# Altium PCB ADA.PcbDoc (part 3 of 3)
Units mm, origin at the board's own origin, x right, y up, seen from the top; angles counter-clockwise.
Board outline 200 x 100 mm, 2 copper layers (Top Layer, Bottom Layer); 139 components, 141 nets, 517 pads, 145 vias.
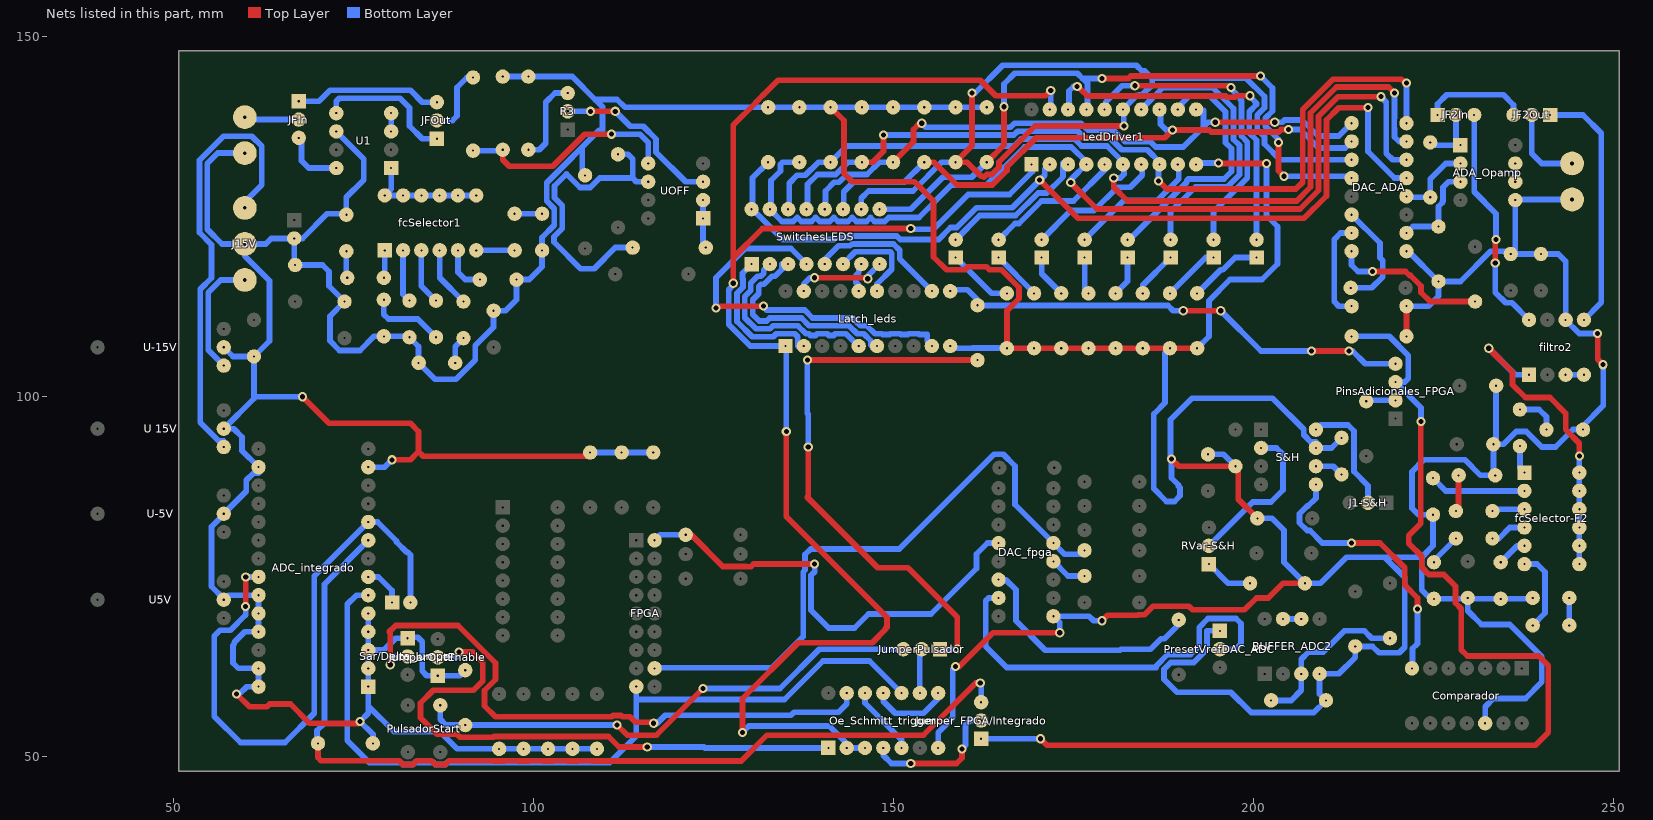
[diagram p2: the nets of this part, all layers, seen from the top]

## Via types
v1: diameter 1.27, hole 0.711, Top Layer to Bottom Layer, 145 vias

## Nets (pads, with @x,y where several pads share a name; then routed paths per layer and width w, separated by ;. In a path a pad name is that pad's centre, name@x,y a point inside that pad or via, vN(x,y) a via of type N, cw(c..) or ccw(c..) an arc to the next point about the centre after c; other vN are vias at no path point) (continued)
GND_ADC_net: "U 15V.2" ADA_Opamp.5 ADC_integrado.1 ADC_integrado.2 ADC_integrado.3 ADC_integrado.4 ADC_integrado.5 ADC_integrado.13 ADC_integrado.16 ADC_integrado.23 ADC_integrado.24 ADC_integrado.25 ADC_integrado.27 ADC_integrado.28 AlimentacionFPGA.2 BUFFER_ADC2.4 C1-F2.1 C1.1 C3-F2.1 C3.1 C4-F2.1 C4.1 C6-F2.1 C6.1 C8-F2.1 C8.1 C9.1 C10-F2.1 C_decouop_adc_chip.1 C_decoupComp.2 C_decoupDACBuffer.1 Ccoup1-Filter.1 Ccoup1-S&H.2 Ccoup2-Filter.1 Ccoup2-S&H.2 Ccoup-F2a.1 Ccoup-F2b.1 Ccoupvcc1.2 Ccoupvcc3.2 Ccoupvcc5.2 Ccoupvcc7.2 Ch-S&H.2 CLK_RES0.2 CLK_RES1.2 CLK_RES2.2 CLK_RES3.2 CLK_RES4.2 CLK_RES5.2 CLK_RES6.2 CLK_RES7.2 Comparador.12 D2OFF.1 DAC_ADA.1 DAC_ADA_R2.2 DAC_ADA_R4.1 DAC_fpga.1 Divisor10V_ADC_R2.1 Entrada.1 filtro2.6 J15V.2 JumperOutEnable.1 Latch_leds.10 LedDriver1.10 OE_PulldownADC_R1.1 OE_PulldownADC_R2.1 Oe_Schmitt_trigger.7 PresetVrefDAC_ADC.1 R1-S&H.1 R4.1 R6.1 R_de_JohnLednon1.2 R_de_JohnLednon2.2 R_de_JohnLednon3.2 R_de_JohnLednon4.2 R_de_JohnLednon5.2 R_de_JohnLednon6.2 R_de_JohnLednon7.2 R_de_JohnLednon8.2 R_de_TaxiDriver1.2 R_de_TaxiDriver2.2 R_de_TaxiDriver3.2 R_de_TaxiDriver4.2 R_de_TaxiDriver5.2 R_de_TaxiDriver6.2 R_de_TaxiDriver7.2 R_de_TaxiDriver8.2 R_PullDownPulsador.2 S&H.7 Salida.2 Sar/Delta_Jumper.1 U1.6 U5V.2 U-5V.2 U-15V.2 | length 1047.9
  Top Layer w0.8: v1(58.801,58.674) 60.585,56.89 63.009,56.89 63.396,57.277 66.283,57.277 68.944,54.616 71.264,54.616 71.313,54.567 75.649,54.567 v1(75.946,54.864) ; v1(67.945,99.949) 71.628,96.266 82.931,96.266 84.074,95.123 84.074,92.329 ; v1(80.391,91.186) 82.931,91.186 84.074,92.329 ; CLK_RES0.2@107.886,92.202 107.379,91.694 84.709,91.694 84.074,92.329 ; R_de_TaxiDriver3.2@141.278,140.132 143.129,138.281 143.129,130.937 144.272,129.794 152.908,129.794 155.575,127.127 155.575,119.355 157.351,117.578 159.931,117.578 160.336,117.983 162.916,117.983 163.32,117.578 164.997,117.578 167.453,115.122 167.453,113.596 165.753,111.896 R_de_JohnLednon8.2@165.753,106.68 R_de_JohnLednon7.2@169.527,106.68 R_de_JohnLednon6.2@173.301,106.68 R_de_JohnLednon5.2@177.074,106.68 R_de_JohnLednon4.2@180.848,106.68 R_de_JohnLednon3.2@184.622,106.68 R_de_JohnLednon2.2@188.395,106.68 R_de_JohnLednon1.2@192.169,106.68 ; v1(158.623,62.484) 159.131,62.484 163.83,67.183 v1(173.101,67.183) ; v1(178.943,68.834) 179.705,69.596 183.913,69.596 183.991,69.674 184.854,69.674 186.046,70.866 191.008,70.866 191.516,70.358 198.755,70.358 200.406,72.009 202.057,72.009 204.089,74.041 R1-S&H.1@207.137,74.041 ; v1(188.595,91.313) 189.611,90.297 Ccoup1-S&H.2@197.485,90.297 197.866,89.916 197.866,85.725 C_decoupComp.2@200.533,83.058 ; v1(195.123,132.385) 195.174,132.334 v1(201.803,132.334) ; OE_PulldownADC_R1.1@221.234,108.331 DAC_ADA_R2.2@221.234,112.522 ; v1(247.777,108.712) 247.777,105.156 v1(248.539,104.394)
  Bottom Layer w0.8: U-15V.2@57.023,106.807 58.293,105.537 Ccoupvcc5.2@61.214,105.537 ; v1(58.801,58.674) 59.182,58.674 60.198,59.69 ADC_integrado.28@61.849,59.69 ADC_integrado.27@61.849,62.23 59.055,62.23 58.293,62.992 58.293,65.422 58.485,65.614 58.485,65.851 59.944,67.31 ADC_integrado.25@61.849,67.31 ADC_integrado.24@61.849,69.85 ADC_integrado.23@61.849,72.39 57.658,72.39 U5V.2@57.023,71.755 57.023,71.891 55.323,73.591 55.323,81.906 57.023,83.606 U-5V.2@57.023,83.693 60.149,86.819 60.149,88.334 61.145,89.33 61.849,89.33 ADC_integrado.16@61.849,90.17 59.563,92.456 59.563,94.361 58.42,95.504 57.023,95.504 61.214,99.695 ; Entrada.1@59.944,133.771 56.174,133.771 54.737,132.334 54.737,123.19 56.769,121.158 J15V.2@59.944,121.158 ; v1(67.945,99.949) 61.468,99.949 61.214,99.695 ; U1.6@72.644,136.779 76.454,132.969 76.454,130.048 74.041,127.635 C1.1@74.041,125.222 73.914,125.349 71.374,125.349 67.945,121.92 AlimentacionFPGA.2@66.802,121.92 ; ADC_integrado.5@77.089,69.85 ADC_integrado.4@77.089,67.31 ADC_integrado.3@77.089,64.77 ; ADC_integrado.13@77.089,90.17 79.375,90.17 v1(80.391,91.186) ; OE_PulldownADC_R2.1@77.724,51.816 77.724,53.086 v1(75.946,54.864) 77.089,56.007 77.089,57.023 ; R_PullDownPulsador.2@90.551,61.976 89.789,61.214 JumperOutEnable.1@86.741,61.214 85.217,61.214 84.582,61.849 84.582,65.913 83.947,66.548 82.677,66.548 Sar/Delta_Jumper.1@82.55,66.421 80.899,66.421 79.248,64.77 ADC_integrado.3@77.089,64.77 ; R6.1@95.758,144.399 R4.1@99.314,144.399 105.41,144.399 108.648,141.16 ; 106.807,134.493 106.807,131.064 D2OFF.1@107.188,130.683 ; CLK_RES0.2@107.886,92.202 CLK_RES1.2@112.268,92.202 CLK_RES2.2@116.649,92.202 ; CLK_RES7.2@108.839,51.054 CLK_RES6.2@105.442,51.054 CLK_RES5.2@102.044,51.054 CLK_RES4.2@98.647,51.054 CLK_RES3.2@95.25,51.054 89.408,51.054 86.995,53.467 80.645,53.467 77.089,57.023 ; Oe_Schmitt_trigger.7@156.21,51.181 156.21,53.34 158.242,55.372 158.242,62.103 v1(158.623,62.484) ; Latch_leds.10@157.879,106.985 158.184,106.68 160.918,106.68 ; 160.967,106.729 165.753,106.729 R_de_JohnLednon8.2@165.753,106.68 ; R_de_TaxiDriver8.2@162.959,140.132 R_de_TaxiDriver7.2@158.623,140.132 R_de_TaxiDriver6.2@154.287,140.132 R_de_TaxiDriver5.2@149.951,140.132 R_de_TaxiDriver4.2@145.615,140.132 R_de_TaxiDriver3.2@141.278,140.132 R_de_TaxiDriver2.2@136.942,140.132 R_de_TaxiDriver1.2@132.606,140.132 112.725,140.132 111.633,141.224 108.712,141.224 108.648,141.16 ; v1(173.101,67.183) 173.101,68.58 DAC_fpga.1@172.212,69.469 177.165,69.469 177.8,68.834 v1@178.816,68.834 ; R_de_JohnLednon2.2@188.395,106.68 187.723,106.008 187.723,99.109 186.16,97.546 186.16,87.161 187.915,85.406 189.021,85.406 189.803,86.188 189.803,87.294 189.568,87.529 189.568,87.705 188.595,88.678 v1(188.595,91.313) 188.468,91.44 188.468,96.742 191.464,99.738 202.649,99.738 206.961,95.426 206.961,94.673 207.957,93.677 208.661,93.677 S&H.7@208.661,92.837 210.82,92.837 Ch-S&H.2@212.217,94.234 ; R_de_JohnLednon1.2@192.169,106.68 193.802,108.313 193.802,113.284 196.723,116.205 201.168,116.205 203.327,118.364 203.327,123.571 201.803,125.095 v1(201.803,132.334) ; LedDriver1.10@192.169,132.385 v1(195.123,132.385) ; Ccoup2-S&H.2@193.675,91.948 195.834,91.948 Ccoup1-S&H.2@197.485,90.297 ; PresetVrefDAC_ADC.1@195.326,67.437 193.548,67.437 193.548,64.897 191.692,63.041 188.517,63.041 187.579,62.103 187.579,60.706 189.357,58.928 196.85,58.928 199.693,56.085 208.358,56.085 Divisor10V_ADC_R2.1@210.058,57.785 209.169,58.674 BUFFER_ADC2.4@209.169,61.468 211.836,61.468 214.122,63.754 C_decoupDACBuffer.1@214.122,65.278 216.535,65.278 217.424,64.389 220.218,64.389 220.98,65.151 220.98,74.872 218.186,77.666 ; C_decoupComp.2@200.533,83.058 202.565,83.058 204.216,81.407 204.216,76.962 R1-S&H.1@207.137,74.041 209.296,74.041 212.921,77.666 218.186,77.666 ; DAC_ADA_R2.2@221.234,112.522 224.282,112.522 225.679,113.919 DAC_ADA_R4.1@225.679,115.951 ; DAC_ADA.1@221.234,120.142 221.488,120.142 DAC_ADA_R4.1@225.679,115.951 ; Ccoup-F2a.1@229.743,72.009 Ccoup-F2a.1@229.743,71.882 ; Comparador.12@232.156,54.61 232.156,56.896 233.299,58.039 237.744,58.039 240.03,60.325 240.03,63.881 235.585,68.326 231.648,68.326 229.743,70.231 Ccoup-F2a.1@229.743,71.882 ; Ccoupvcc7.2@233.68,101.346 233.68,93.726 Ccoup-F2b.1@233.299,93.345 ; C10-F2.1@238.76,72.009 238.633,71.882 C8-F2.1@234.315,71.882 Ccoup-F2a.1@229.743,71.882 ; Salida.2@244.221,127.334 236.427,127.334 ADA_Opamp.5@236.347,127.254 236.347,120.396 Ccoupvcc3.2@235.712,119.761 ; v1(247.777,108.712) 245.237,108.712 filtro2.6@243.332,110.617 243.332,118.745 242.316,119.761 C_decouop_adc_chip.1@239.903,119.761 Ccoupvcc3.2@235.712,119.761 ; v1(248.539,104.394) 248.539,98.679 245.745,95.885 C1-F2.1@245.745,95.377 244.348,95.377 241.935,92.964 240.03,92.964 237.871,95.123 236.474,95.123 234.696,93.345 Ccoup-F2b.1@233.299,93.345 ; J15V.2@59.944,121.158 62.865,121.158 63.627,121.92 AlimentacionFPGA.2@66.802,121.92 ; J15V.2@59.944,121.158 59.944,119.481 63.373,116.052 63.373,107.696 Ccoupvcc5.2@61.214,105.537 ; 61.214,99.695 Ccoupvcc5.2@61.214,105.537 ; AlimentacionFPGA.2@66.802,121.92 66.802,118.364 Ccoupvcc1.2@66.929,118.237 70.739,118.237 71.628,117.348 71.628,115.316 Ccoup2-Filter.1@73.787,113.157 71.755,111.125 71.755,107.705 73.083,106.377 75.929,106.377 77.883,108.331 C4.1@79.248,108.331 82.677,108.331 C3.1@82.804,108.204 84.074,106.934 C6.1@84.074,104.648 86.36,102.362 89.272,102.362 91.948,105.038 91.948,107.061 94.488,109.601 Ccoup1-Filter.1@94.488,111.887 96.139,111.887 97.663,113.411 C8.1@97.663,116.205 99.441,116.205 101.219,117.983 C9.1@101.219,120.269 101.219,122.047 102.919,123.747 102.919,126.053 101.854,127.118 101.854,129.667 109.138,136.951 109.536,136.951 109.601,137.016 109.601,140.208 108.648,141.16 ; 77.089,57.023 ADC_integrado.1@77.089,59.69 ADC_integrado.2@77.089,62.23 ADC_integrado.3@77.089,64.77 ; 218.186,77.666 223.344,77.666 ; 223.344,77.666 224.917,79.239 C3-F2.1@224.917,83.566 222.885,83.566 221.996,84.455 221.996,89.535 223.647,91.186 229.362,91.186 231.521,89.027 C4-F2.1@233.553,89.027 233.299,89.281 Ccoup-F2b.1@233.299,93.345 ; 223.344,77.666 223.344,73.103 224.565,71.882 C6-F2.1@225.044,71.882 Ccoup-F2a.1@229.743,71.882 ; DAC_ADA_R4.1@225.679,115.951 228.727,115.951 232.918,120.142 235.331,120.142 Ccoupvcc3.2@235.712,119.761
InvOpAmp: ADA_Opamp.2 DAC_ADA.4 DAC_ADA_R3.1 | length 11
  Bottom Layer w0.8: DAC_ADA.4@221.234,127.762 221.361,127.635 DAC_ADA_R3.1@224.536,127.635 224.536,130.175 226.695,132.334 ADA_Opamp.2@228.727,132.334
L1: DAC_ADA.5 LedDriver1.2 R_de_TaxiDriver1.1 SwitchesLEDS.16 | length 129.3
  Top Layer w0.8: v1(170.307,130.048) 175.641,124.714 207.01,124.714 210.12,127.824 210.12,138.365 211.836,140.081 v1(215.9,140.081)
  Bottom Layer w0.8: R_de_TaxiDriver1.1@132.606,132.512 130.447,130.353 130.447,126.129 SwitchesLEDS.16@130.302,125.984 130.438,125.984 134.629,121.793 141.7,121.793 141.911,122.004 143.531,122.004 143.791,122.264 150.468,122.264 150.939,121.793 156.288,121.793 157.937,123.442 158.786,123.442 161.538,126.195 166.508,126.195 171.009,130.696 171.009,131.545 LedDriver1.2@171.849,132.385 ; v1(215.9,140.081) 215.9,133.985 219.583,130.302 DAC_ADA.5@221.234,130.302
L2: DAC_ADA.6 LedDriver1.4 R_de_TaxiDriver2.1 SwitchesLEDS.15 | length 134
  Top Layer w0.8: v1(174.625,129.667) 178.265,126.027 206.45,126.027 209.02,128.597 209.02,138.899 211.726,141.605 v1(217.678,141.605)
  Bottom Layer w0.8: R_de_TaxiDriver2.1@136.942,132.512 134.635,132.512 134.306,132.183 134.306,131.294 132.987,129.975 132.987,126.129 SwitchesLEDS.15@132.842,125.984 134.542,124.284 136.086,124.284 136.643,124.841 136.661,124.841 137.218,124.284 138.626,124.284 139.183,124.841 139.201,124.841 139.758,124.284 141.166,124.284 141.723,124.841 141.741,124.841 142.298,124.284 143.706,124.284 144.263,124.841 144.281,124.841 144.838,124.284 146.246,124.284 146.803,124.841 146.821,124.841 147.378,124.284 148.786,124.284 149.343,124.841 153.543,124.841 158.031,129.329 162.889,129.329 168.18,134.62 174.694,134.62 176.929,132.385 174.625,130.081 v1(174.625,129.667) ; v1(217.678,141.605) 218.44,140.843 218.44,139.088 218.434,139.082 218.434,135.61 218.44,135.604 218.44,133.731 219.329,132.842 DAC_ADA.6@221.234,132.842
L3: DAC_ADA.7 LedDriver1.6 R_de_TaxiDriver3.1 SwitchesLEDS.14 | length 119.3
  Top Layer w0.8: v1(180.594,130.302) 180.594,129.032 182.499,127.127 205.994,127.127 207.92,129.053 207.92,139.355 211.505,142.94 218.756,142.94 v1(219.583,142.113)
  Bottom Layer w0.8: SwitchesLEDS.14@135.382,125.984 135.527,126.129 135.527,129.594 136.616,130.683 137.759,130.683 139.588,132.512 R_de_TaxiDriver3.1@141.278,132.512 143.514,134.747 166.751,134.747 167.724,135.72 175.15,135.72 176.123,134.747 179.647,134.747 182.009,132.385 182.009,130.828 181.483,130.302 v1(180.594,130.302) ; v1(219.583,142.113) 219.583,138.675 219.534,138.626 219.534,137.218 219.583,137.169 219.583,136.017 220.218,135.382 DAC_ADA.7@221.234,135.382
L4: DAC_ADA.8 LedDriver1.8 R_de_TaxiDriver4.1 SwitchesLEDS.13 | length 114.5
  Top Layer w0.8: R_de_TaxiDriver4.1@145.615,132.512 147.117,132.512 148.633,134.028 v1(148.633,136.271) ; v1(186.817,129.921) 187.96,128.778 205.867,128.778 206.82,129.731 206.82,139.81 211.05,144.04 220.535,144.04 221.234,143.341 v1(221.234,143.51)
  Bottom Layer w0.8: SwitchesLEDS.13@137.922,125.984 138.067,126.129 138.067,129.436 139.441,130.81 141.981,130.81 143.683,132.512 R_de_TaxiDriver4.1@145.615,132.512 ; v1(148.633,136.271) 166.719,136.271 167.268,136.82 175.605,136.82 176.578,135.847 180.103,135.847 181.711,134.239 185.235,134.239 187.089,132.385 186.817,132.113 v1(186.817,129.921) ; DAC_ADA.8@221.234,137.922 v1(221.234,143.51)
L5: DAC_ADA.9 LedDriver1.11 R_de_TaxiDriver5.1 SwitchesLEDS.12 | length 87.6
  Top Layer w0.8: R_de_TaxiDriver5.1@149.951,132.512 152.781,135.342 152.781,137.033 v1@153.67,137.922 ; v1(194.691,138.049) v1(202.946,138.049)
  Bottom Layer w0.8: SwitchesLEDS.12@140.462,125.984 140.553,126.075 140.553,128.524 141.739,129.71 142.436,129.71 143.538,130.812 146.319,130.812 148.019,132.512 R_de_TaxiDriver5.1@149.951,132.512 ; v1(153.924,137.922) 154.475,137.371 166.264,137.371 166.813,137.92 176.061,137.92 177.034,136.947 180.558,136.947 182.166,135.339 185.691,135.339 186.41,134.62 190.246,134.62 193.04,137.414 ; 193.04,139.7 193.04,137.414 ; v1(194.691,138.049) 193.675,138.049 193.04,137.414 ; v1(202.946,138.049) 203.979,138.049 204.298,138.368 206.723,138.368 208.947,136.144 211.836,136.144 DAC_ADA.9@213.614,137.922
L6: DAC_ADA.10 LedDriver1.13 R_de_TaxiDriver6.1 SwitchesLEDS.11 | length 85.3
  Top Layer w0.8: R_de_TaxiDriver6.1@154.287,132.512 155.651,132.512 158.834,129.329 163.736,129.329 165.759,131.352 165.759,131.825 169.824,135.89 187.665,135.89 v1(188.765,136.99) 193.862,136.99 194.138,136.714 203.499,136.714 203.818,137.033 v1(204.851,137.033)
  Bottom Layer w0.8: SwitchesLEDS.11@143.002,125.984 143.093,126.075 143.093,128.397 144.408,129.712 151.487,129.712 R_de_TaxiDriver6.1@154.287,132.512 ; LedDriver1.13@187.089,140.005 187.089,137.777 187.876,136.99 v1(188.765,136.99) ; v1(204.851,137.033) 206.502,137.033 209.042,134.493 212.725,134.493 DAC_ADA.10@213.614,135.382
L7: DAC_ADA.11 LedDriver1.15 R_de_TaxiDriver7.1 SwitchesLEDS.10 | length 127.9
  Top Layer w0.8: v1(160.909,142.113) 160.909,134.798 R_de_TaxiDriver7.1@158.623,132.512 160.223,132.512 162.179,130.556 162.433,130.556 162.56,130.429 162.943,130.812 163.663,130.812 164.659,131.808 164.659,132.528 169.672,137.541 v1(181.991,137.541)
  Bottom Layer w0.8: SwitchesLEDS.10@145.542,125.984 145.542,127.508 146.558,128.524 152.703,128.524 156.691,132.512 R_de_TaxiDriver7.1@158.623,132.512 ; v1(160.909,142.113) 161.313,142.113 165.166,145.966 183.703,145.966 184.497,145.172 184.901,145.172 185.928,144.145 ; v1(181.991,137.541) 181.991,139.987 182.009,140.005 183.798,141.794 184.068,141.794 184.133,141.859 184.531,141.859 185.928,143.256 185.928,144.145 ; DAC_ADA.11@213.614,132.842 203.708,132.842 201.524,135.026 201.524,136.027 200.511,137.04 200.511,139.058 201.524,140.071 201.524,141.613 198.927,144.21 185.993,144.21 185.928,144.145
L8: DAC_ADA.12 LedDriver1.17 R_de_TaxiDriver8.1 SwitchesLEDS.9 | length 96.1
  Top Layer w0.8: R_de_TaxiDriver8.1@162.959,132.512 165.354,134.907 v1(165.354,140.208) ; v1(178.943,144.145) 182.643,144.145 182.962,144.464 v1(200.976,144.464) ; v1(203.454,135.255) 203.454,131.318 v1(204.216,130.556)
  Bottom Layer w0.8: SwitchesLEDS.9@148.082,125.984 152.4,125.984 156.845,130.429 160.876,130.429 R_de_TaxiDriver8.1@162.959,132.512 ; v1(165.354,140.208) 165.354,143.383 166.837,144.866 175.538,144.866 176.259,144.145 ; LedDriver1.17@176.929,140.005 176.929,143.475 176.259,144.145 ; v1(178.943,144.145) 176.259,144.145 ; v1(200.976,144.464) 202.624,142.816 202.624,139.615 201.611,138.602 201.611,137.496 203.454,135.653 v1(203.454,135.255) ; v1(204.216,130.556) 213.36,130.556 DAC_ADA.12@213.614,130.302
LSB_ADC_OUT8: DAC_fpga.12 FPGA.2 R_ADC_D8.2 | length 64.3
  Top Layer w0.8: R_ADC_D8.2@121.158,80.772 121.92,80.772 126.316,76.376 129.482,76.376 129.531,76.327 130.175,76.327 130.556,76.708 v1(139.065,76.708)
  Bottom Layer w0.8: FPGA.2@116.84,80.01 117.602,80.772 R_ADC_D8.2@121.158,80.772 ; v1(139.065,76.708) 139.065,75.658 138.564,75.157 138.564,70.288 141.013,67.839 144.61,67.839 146.537,69.766 155.205,69.766 161.542,76.103 161.542,78.103 163.068,79.629 DAC_fpga.12@164.592,79.629
MSB_ADC_OUT1: DAC_fpga.5 FPGA.16 R_ADC_D1.2 | length 87.4
  Bottom Layer w0.8: FPGA.16@116.84,62.23 116.924,62.314 133.148,62.314 137.464,66.63 137.464,75.613 137.73,75.879 137.73,78.023 138.512,78.805 150.814,78.805 163.957,91.948 165.258,91.948 166.878,90.328 166.878,84.963 DAC_fpga.5@172.212,79.629 173.761,78.08 R_ADC_D1.2@176.53,78.08
Net+VrefDAC_ADC_R1_1: +VrefDAC_ADC_R1.1 DAC_fpga.14 | length 34
  Bottom Layer w0.8: DAC_fpga.14@164.592,74.549 165.608,74.549 167.005,73.152 167.005,68.834 171.091,64.748 181.461,64.748 181.589,64.876 185.685,64.876 187.15,66.341 187.626,66.341 +VrefDAC_ADC_R1.1@190.246,68.961
NetADA_Opamp_1: ADA_Opamp.1 DAC_ADA_R3.2 JF2In.2 | length 8.8
  Bottom Layer w0.8: DAC_ADA_R3.2@224.536,135.255 224.917,134.874 ADA_Opamp.1@228.727,134.874 228.092,135.509 JF2In.2@228.092,139.065
NetADA_Opamp_6: ADA_Opamp.6 ADA_Opamp.7 | length 2.5
  Bottom Layer w0.8: ADA_Opamp.6@236.347,129.794 ADA_Opamp.7@236.347,132.334
NetADC_integrado_7: ADC_integrado.7 Clock/EOC_Chip.1 | length 5.7
  Bottom Layer w0.8: ADC_integrado.7@77.089,74.93 78.486,74.93 80.391,73.025 Clock/EOC_Chip.1@80.391,71.374
NetADC_integrado_10: ADC_integrado.10 ADC_integrado.22 Clock/EOC_Chip.2 | length 85
  Top Layer w0.8: v1(60.058,70.795) 60.058,74.917 v1(60.071,74.93)
  Bottom Layer w0.8: v1(60.058,70.795) 60.058,69.632 57.941,67.515 56.483,67.515 55.688,66.72 55.688,55.564 59.331,51.921 65.51,51.921 69.596,56.007 69.596,75.057 ADC_integrado.10@77.089,82.55 78.359,82.55 81.004,79.905 81.004,79.763 82.43,78.337 82.572,78.337 82.931,77.978 Clock/EOC_Chip.2@82.931,71.374 ; v1(60.071,74.93) ADC_integrado.22@61.849,74.93
NetBUFFER_ADC2_3: BUFFER_ADC2.3 Divisor10V_ADC_R1.1 Divisor10V_ADC_R2.2 | length 23.5
  Bottom Layer w0.8: Divisor10V_ADC_R2.2@202.438,57.785 205.232,57.785 206.629,59.182 BUFFER_ADC2.3@206.629,61.468 206.629,63.5 207.645,64.516 209.677,64.516 212.598,67.437 215.392,67.437 216.408,66.421 Divisor10V_ADC_R1.1@218.948,66.421
NetBUFFER_ADC2_6: BUFFER_ADC2.6 BUFFER_ADC2.7 | length 2.5
  Bottom Layer w0.8: BUFFER_ADC2.7@204.089,69.088 BUFFER_ADC2.6@206.629,69.088
NetC1-F2_2: C1-F2.2 C2-F2.1 | length 5.9
  Bottom Layer w0.8: C2-F2.1@236.982,98.171 239.649,98.171 240.665,97.155 C1-F2.2@240.665,95.377
NetC1_2: C1.2 C2.1 | length 3.7
  Bottom Layer w0.8: C1.2@74.041,120.142 74.041,116.586 C2.1@74.168,116.459
NetC2-F2_2: C2-F2.2 fcSelector-F2.1 | length 3.9
  Bottom Layer w0.8: C2-F2.2@236.982,93.091 236.982,90.043 fcSelector-F2.1@237.617,89.408
NetC2_2: C2.2 fcSelector1.1 | length 3.9
  Bottom Layer w0.8: C2.2@79.248,116.459 79.375,116.586 fcSelector1.1@79.375,120.269
NetC3-F2_2: C3-F2.2 fcSelector-F2.2 | length 13.4
  Bottom Layer w0.8: C3-F2.2@224.917,88.646 226.695,86.868 fcSelector-F2.2@237.617,86.868
NetC3_2: C3.2 fcSelector1.2 | length 7.4
  Bottom Layer w0.8: fcSelector1.2@81.915,120.269 81.915,114.173 C3.2@82.804,113.284
NetC4-F2_2: C4-F2.2 C5-F2.1 | length 5.1
  Top Layer w0.8: C5-F2.1@228.092,84.074 228.473,84.455 C4-F2.2@228.473,89.027
NetC4_2: C4.2 C5.1 | length 10.6
  Bottom Layer w0.8: C4.2@79.248,113.411 79.248,111.379 79.883,110.744 83.947,110.744 C5.1@86.487,108.204
NetC5-F2_2: C5-F2.2 fcSelector-F2.3 | length 4.6
  Bottom Layer w0.8: C5-F2.2@233.172,84.074 233.426,84.328 fcSelector-F2.3@237.617,84.328
NetC5_2: C5.2 fcSelector1.3 | length 7.8
  Bottom Layer w0.8: fcSelector1.3@84.455,120.269 84.455,115.316 C5.2@86.487,113.284
NetC6-F2_2: C6-F2.2 C7-F2.1 | length 4.6
  Bottom Layer w0.8: C6-F2.2@225.044,76.962 225.044,77.216 C7-F2.1@228.092,80.264
NetC6_2: C6.2 C7.1 | length 3.9
  Bottom Layer w0.8: C6.2@89.154,104.648 89.154,106.934 C7.1@90.297,108.077
NetC7-F2_2: C7-F2.2 fcSelector-F2.4 | length 5.1
  Bottom Layer w0.8: C7-F2.2@233.172,80.264 234.061,80.264 235.585,81.788 fcSelector-F2.4@237.617,81.788
NetC7_2: C7.2 fcSelector1.4 | length 8.5
  Bottom Layer w0.8: fcSelector1.4@86.995,120.269 86.995,116.459 C7.2@90.297,113.157
NetC8-F2_2: C8-F2.2 fcSelector-F2.5 | length 4.2
  Bottom Layer w0.8: C8-F2.2@234.315,76.962 236.601,79.248 fcSelector-F2.5@237.617,79.248
NetC8_2: C8.2 fcSelector1.5 | length 6.5
  Bottom Layer w0.8: fcSelector1.5@89.535,120.269 89.535,117.221 90.551,116.205 C8.2@92.583,116.205
NetC9-F2_1: C9-F2.1 C10-F2.2 | length 3.8
  Bottom Layer w0.8: C9-F2.1@243.84,68.199 C10-F2.2@243.84,72.009
NetC9-F2_2: C9-F2.2 fcSelector-F2.6 | length 11.4
  Bottom Layer w0.8: fcSelector-F2.6@237.617,76.708 239.366,76.708 240.46,75.614 240.46,69.899 C9-F2.2@238.76,68.199
NetC9_2: C9.2 C10.1 | length 3.8
  Bottom Layer w0.8: C10.1@97.409,125.349 C9.2@101.219,125.349
NetC10_2: C10.2 fcSelector1.6 | length 5.3
  Bottom Layer w0.8: fcSelector1.6@92.075,120.269 C10.2@97.409,120.269
NetCh-S&H_1: Ch-S&H.1 S&H.6 | length 4
  Bottom Layer w0.8: S&H.6@208.661,90.297 211.074,90.297 Ch-S&H.1@212.217,89.154
NetComparador_7: Comparador.7 S&H.5 | length 38.5
  Top Layer w0.8: v1(213.614,79.629) 217.551,79.629 220.98,76.2 220.98,73.787 222.758,72.009 v1(222.758,70.485)
  Bottom Layer w0.8: S&H.5@208.661,87.757 208.661,85.852 207.567,84.758 207.449,84.758 206.375,83.684 206.375,82.432 207.449,81.358 207.821,81.358 209.55,79.629 v1(213.614,79.629) ; Comparador.7@221.996,62.23 222.08,62.314 222.08,64.981 222.758,65.659 v1(222.758,70.485)
NetDAC_ADA_14: DAC_ADA.14 DAC_ADA_R1.2 | length 15.5
  Bottom Layer w0.8: DAC_ADA_R1.2@213.487,115.062 216.408,115.062 217.932,116.586 217.932,118.872 217.551,119.253 217.551,121.285 DAC_ADA.14@213.614,125.222
NetDAC_ADA_15: DAC_ADA.15 DAC_ADA_R2.1 | length 14.1
  Bottom Layer w0.8: DAC_ADA_R2.1@213.614,112.522 211.836,112.522 211.201,113.157 211.201,121.793 212.09,122.682 DAC_ADA.15@213.614,122.682
NetDAC_ADA_16: DAC_ADA.16 DAC_ADA_cap.1 | length 21.7
  Top Layer w0.8: v1(216.535,117.348) 221.107,117.348 221.693,116.762 221.811,116.762 223.266,115.307 223.266,114.427 224.536,113.157 DAC_ADA_cap.1@230.759,113.157
  Bottom Layer w0.8: DAC_ADA.16@213.614,120.142 213.614,118.237 214.503,117.348 v1(216.535,117.348)
NetDAC_fpga_15: DAC_fpga.15 PresetVrefDAC_ADC.2 | length 55.7
  Bottom Layer w0.8: DAC_fpga.15@164.592,72.009 163.195,72.009 162.814,71.628 162.814,65.278 165.735,62.357 186.479,62.357 186.479,62.559 188.061,64.141 191.236,64.141 192.448,65.353 192.448,67.893 193.692,69.137 197.563,69.137 198.247,68.453 198.247,65.659 197.485,64.897 PresetVrefDAC_ADC.2@195.326,64.897
NetEntrada_2: Entrada.2 JFIn.2 | length 8.5
  Top Layer w0.6: Entrada.2@59.944,138.771 Entrada.2@60.285,138.43
  Bottom Layer w0.8: Entrada.2@59.944,138.771 60.285,138.43 JFIn.2@67.818,138.43
NetfcSelector1_7: fcSelector1.7 fcSelector1.8 fcSelector1.9 fcSelector1.10 fcSelector1.11 fcSelector1.12 U1.1 | length 16.9
  Bottom Layer w0.8: U1.1@80.264,131.699 80.264,128.778 fcSelector1.12@79.375,127.889 fcSelector1.11@81.915,127.889 fcSelector1.10@84.455,127.889 fcSelector1.9@86.995,127.889 fcSelector1.8@89.535,127.889 fcSelector1.7@92.075,127.889
NetfcSelector-F2_7: fcSelector-F2.7 fcSelector-F2.8 fcSelector-F2.9 fcSelector-F2.10 fcSelector-F2.11 fcSelector-F2.12 filtro2.1 | length 44.3
  Top Layer w0.8: v1(232.664,106.68) 235.966,103.378 235.966,101.6 237.744,99.822 241.173,99.822 243.332,97.663 243.332,95.377 245.237,93.472 v1(245.237,91.694)
  Bottom Layer w0.8: v1(232.664,106.68) 236.347,102.997 filtro2.1@238.252,102.997 ; fcSelector-F2.7@245.237,76.708 fcSelector-F2.8@245.237,79.248 fcSelector-F2.9@245.237,81.788 fcSelector-F2.10@245.237,84.328 fcSelector-F2.11@245.237,86.868 fcSelector-F2.12@245.237,89.408 v1(245.237,91.694)
Netfiltro2_3: filtro2.3 filtro2.4 | length 2.5
  Bottom Layer w0.8: filtro2.3@243.332,102.997 filtro2.4@245.872,102.997
Netfiltro2_5: filtro2.5 JF2Out.1 | length 35.1
  Bottom Layer w0.8: JF2Out.1@241.173,139.065 245.745,139.065 248.285,136.525 248.285,113.03 filtro2.5@245.872,110.617
Netfiltro2_8: filtro2.8 JF2In.3 | length 32
  Top Layer w0.8: v1(233.553,118.491) 233.553,121.666 v1(233.68,121.793)
  Bottom Layer w0.8: JF2In.3@230.632,139.065 230.632,128.397 233.68,125.349 v1(233.68,121.793) ; v1@233.553,118.237 233.553,114.436 235.008,112.981 235.888,112.981 filtro2.8@238.252,110.617
NetJ1-S&H_2: J1-S&H.2 S&H.8 | length 16.7
  Bottom Layer w0.8: S&H.8@208.661,95.377 209.296,96.012 213.106,96.012 213.946,95.172 213.946,89.552 215.9,87.598 J1-S&H.2@215.9,85.217
NetJ15V_1: J15V.1 U-15V.1 | length 16.9
  Bottom Layer w0.8: U-15V.1@57.023,104.267 54.864,106.426 54.864,114.427 56.595,116.158 J15V.1@59.944,116.158
NetJ15V_3: "U 15V.1" J15V.3 | length 63.1
  Bottom Layer w0.8: 57.023,92.964 57.023,93.804 56.319,93.804 53.764,96.359 53.764,114.883 55.323,116.442 55.323,121.048 53.637,122.734 53.637,132.79 56.968,136.121 60.917,136.121 62.294,134.744 62.294,129.349 59.944,126.999 J15V.3@59.944,126.158
NetJF2In_1: JF2In.1 JF2Out.3 | length 14.6
  Bottom Layer w0.8: JF2In.1@225.552,139.065 225.552,140.589 226.822,141.859 234.696,141.859 236.093,140.462 JF2Out.3@236.093,139.065
NetJF2Out_2: JF2Out.2 Salida.1 | length 11.5
  Bottom Layer w0.8: JF2Out.2@238.633,139.065 238.633,133.731 240.03,132.334 Salida.1@244.221,132.334
NetJFIn_1: JFIn.1 JFOut.3 | length 20.1
  Bottom Layer w0.8: JFIn.1@67.818,140.97 70.231,140.97 71.755,142.494 82.931,142.494 84.582,140.843 JFOut.3@86.614,140.843
NetJFIn_3: JFIn.3 U1.8 | length 8.4
  Bottom Layer w0.8: JFIn.3@67.818,135.89 67.818,132.715 68.834,131.699 U1.8@72.644,131.699
NetJFOut_1: JFOut.1 U1.5 | length 19.6
  Bottom Layer w0.8: U1.5@72.644,139.319 72.644,140.97 73.068,141.394 81.491,141.394 82.804,140.081 82.804,137.541 84.582,135.763 JFOut.1@86.614,135.763
NetJFOut_2: JFOut.2 R5.2 | length 9.8
  Bottom Layer w0.8: JFOut.2@86.614,138.303 88.773,138.303 89.408,138.938 89.408,142.875 90.805,144.272 R5.2@91.63,144.272
NetJOHN_LEDNON1_1: JOHN_LEDNON1.1 LedDriver1.18 | length 48.7
  Top Layer w0.8: 176.022,142.621 176.938,141.705 196.132,141.705 196.297,141.54 197.403,141.54 197.595,141.732 v1(199.517,141.732)
  Bottom Layer w0.8: LedDriver1.18@174.389,140.005 174.389,142.385 175.006,143.002 v1(175.514,143.002) ; v1@199.644,141.478 200.424,140.698 200.424,140.526 199.411,139.513 199.411,136.585 200.424,135.572 JOHN_LEDNON1.1@200.424,121.742
NetJOHN_LEDNON1_2: JOHN_LEDNON1.2 R_de_JohnLednon1.1 | length 10.3
  Bottom Layer w0.8: R_de_JohnLednon1.1@192.169,114.3 195.448,117.578 195.745,117.578 197.445,119.278 JOHN_LEDNON1.2@200.424,119.278
NetJOHN_LEDNON2_1: JOHN_LEDNON2.1 LedDriver1.16 | length 43
  Top Layer w0.8: v1(183.515,143.129) 196.596,143.129 v1(196.85,142.875)
  Bottom Layer w0.8: LedDriver1.16@179.469,140.005 179.469,140.861 181.737,143.129 v1(183.515,143.129) ; JOHN_LEDNON2.1@194.455,121.742 194.455,125.621 199.136,130.302 199.136,135.304 198.311,136.129 198.311,141.05 198.182,141.179 198.182,141.416 v1@196.977,142.621
NetJOHN_LEDNON2_2: JOHN_LEDNON2.2 R_de_JohnLednon2.1 | length 8.1
  Bottom Layer w0.8: R_de_JohnLednon2.1@188.395,114.3 193.374,119.278 JOHN_LEDNON2.2@194.455,119.278
NetJOHN_LEDNON3_1: JOHN_LEDNON3.1 LedDriver1.14 | length 40.2
  Bottom Layer w0.8: LedDriver1.14@184.549,140.005 187.419,142.875 194.31,142.875 197.211,139.974 197.211,135.673 198.036,134.848 198.036,130.758 196.353,129.075 191.94,129.075 188.486,125.621 JOHN_LEDNON3.1@188.486,121.742
NetJOHN_LEDNON3_2: JOHN_LEDNON3.2 R_de_JohnLednon3.1 | length 6.6
  Bottom Layer w0.8: R_de_JohnLednon3.1@184.622,114.3 184.622,115.414 JOHN_LEDNON3.2@188.486,119.278
NetJOHN_LEDNON4_1: JOHN_LEDNON4.1 LedDriver1.12 | length 35.2
  Bottom Layer w0.8: JOHN_LEDNON4.1@182.517,121.742 182.734,121.742 190.729,129.738 190.729,129.954 190.95,130.175 195.898,130.175 196.936,131.213 196.936,134.393 196.111,135.218 196.111,139.518 193.925,141.705 191.108,141.705 190.043,140.64 LedDriver1.12@190.043,140.005
NetJOHN_LEDNON4_2: JOHN_LEDNON4.2 R_de_JohnLednon4.1 | length 5.7
  Bottom Layer w0.8: R_de_JohnLednon4.1@180.848,114.3 182.517,115.969 JOHN_LEDNON4.2@182.517,119.278
NetJOHN_LEDNON5_1: JOHN_LEDNON5.1 LedDriver1.9 | length 18.8
  Bottom Layer w0.8: JOHN_LEDNON5.1@176.548,121.742 181.991,127.185 186.621,127.185 189.629,130.193 LedDriver1.9@189.629,132.385
NetJOHN_LEDNON5_2: JOHN_LEDNON5.2 R_de_JohnLednon5.1 | length 5.2
  Bottom Layer w0.8: JOHN_LEDNON5.2@176.548,119.278 176.548,114.826 R_de_JohnLednon5.1@177.074,114.3
NetJOHN_LEDNON6_1: JOHN_LEDNON6.1 LedDriver1.7 | length 19.4
  Bottom Layer w0.8: JOHN_LEDNON6.1@170.579,121.742 174.625,125.788 177.858,125.788 181.102,129.032 182.88,129.032 184.549,130.701 LedDriver1.7@184.549,132.385
NetJOHN_LEDNON6_2: JOHN_LEDNON6.2 R_de_JohnLednon6.1 | length 6.1
  Bottom Layer w0.8: JOHN_LEDNON6.2@170.579,119.278 170.579,117.021 R_de_JohnLednon6.1@173.301,114.3
NetJOHN_LEDNON7_1: JOHN_LEDNON7.1 LedDriver1.5 | length 19.7
  Bottom Layer w0.8: JOHN_LEDNON7.1@164.61,121.742 166.863,123.995 167.419,123.995 170.551,127.127 175.006,127.127 179.469,131.59 LedDriver1.5@179.469,132.385
NetJOHN_LEDNON7_2: JOHN_LEDNON7.2 R_de_JohnLednon7.1 | length 7
  Bottom Layer w0.8: JOHN_LEDNON7.2@164.61,119.278 169.527,114.362 R_de_JohnLednon7.1@169.527,114.3
NetJOHN_LEDNON8_1: JOHN_LEDNON8.1 LedDriver1.3 | length 21.3
  Bottom Layer w0.8: JOHN_LEDNON8.1@158.641,121.742 161.994,125.095 166.964,125.095 170.096,128.227 171.28,128.227 173.525,130.472 173.525,130.536 173.549,130.56 173.549,132.385 LedDriver1.3@174.389,132.385
NetJOHN_LEDNON8_2: JOHN_LEDNON8.2 R_de_JohnLednon8.1 | length 9.2
  Bottom Layer w0.8: JOHN_LEDNON8.2@158.641,119.278 163.62,114.3 R_de_JohnLednon8.1@165.753,114.3
NetJumper_FPGA/Integrado_2: Jumper_FPGA/Integrado.2 Oe_Schmitt_trigger.4 | length 19.9
  Top Layer w0.8: v1(152.4,49.022) 158.75,49.022 159.512,49.784 v1(159.512,51.054)
  Bottom Layer w0.8: Oe_Schmitt_trigger.4@148.59,51.181 148.59,50.165 149.733,49.022 v1(152.4,49.022) ; v1(159.512,51.054) 160.02,51.562 160.02,54.356 160.655,54.991 Jumper_FPGA/Integrado.2@162.179,54.991
NetJumperOutEnable_2: JumperOutEnable.2 Oe_Schmitt_trigger.1 | length 80
  Top Layer w0.8: v1(89.662,64.516) 91.567,64.516 92.964,63.119 92.964,60.452 91.694,59.182 86.106,59.182 84.328,57.404 84.328,55.372 86.614,53.086 89.417,53.086 89.847,52.656 94.448,52.656 94.546,52.754 110.441,52.754 111.887,51.308 v1(115.824,51.308)
  Bottom Layer w0.8: JumperOutEnable.2@86.741,63.754 89.281,63.754 v1@89.662,64.135 ; v1(115.824,51.308) 123.698,51.308 123.825,51.181 Oe_Schmitt_trigger.1@140.97,51.181
NetJumperPulsador_1: JumperPulsador.1 R_NewStart.2 | length 76.7
  Top Layer w0.8: v1(138.176,92.964) 138.176,86.106 138.049,85.979 147.828,76.2 152.019,76.2 158.877,69.342 v1(158.877,64.897) ; 138.684,105.029 R_NewStart.2@161.671,105.029
  Bottom Layer w0.8: v1(138.049,105.029) 138.049,97.663 138.176,97.536 v1(138.176,92.964) ; JumperPulsador.1@156.464,64.897 v1(158.877,64.897)
NetJumperPulsador_2: JumperPulsador.2 Oe_Schmitt_trigger.9 | length 6.2
  Bottom Layer w0.8: Oe_Schmitt_trigger.9@153.67,58.801 153.67,64.643 JumperPulsador.2@153.924,64.897
NetJumperPulsador_3: JumperPulsador.3 PulsadorStart.4 R_PullDownPulsador.1 | length 72.1
  Top Layer w0.8: v1(111.633,54.356) 113.03,52.959 117.094,52.959 v1(123.571,59.436)
  Bottom Layer w0.8: PulsadorStart.4@87.086,57.098 87.086,55.154 87.884,54.356 R_PullDownPulsador.1@90.551,54.356 v1(111.633,54.356) ; v1(123.571,59.436) 134.239,59.436 139.7,64.897 JumperPulsador.3@151.384,64.897
NetLatch_leds_2: Latch_leds.2 SwitchesLEDS.1 | length 20.7
  Bottom Layer w0.8: SwitchesLEDS.1@130.302,118.364 129.032,117.094 129.032,116.315 129.097,116.25 129.097,115.144 128.27,114.317 128.27,110.395 130.39,108.275 133.319,108.275 133.729,108.685 136.309,108.685 136.719,108.275 136.719,106.985 Latch_leds.2@137.559,106.985
NetLatch_leds_5: Latch_leds.5 SwitchesLEDS.2 | length 27.3
  Bottom Layer w0.8: SwitchesLEDS.2@132.842,118.364 132.002,117.524 132.002,117.074 131.592,116.664 131.142,116.664 130.197,115.719 130.197,114.688 129.37,113.861 129.37,110.914 130.909,109.375 132.864,109.375 133.274,109.785 136.765,109.785 137.865,108.685 138.263,108.685 138.49,108.458 139.168,108.458 139.395,108.685 140.803,108.685 141.03,108.458 141.708,108.458 141.935,108.685 143.408,108.685 145.108,106.985 Latch_leds.5@145.179,106.985
NetLatch_leds_6: Latch_leds.6 SwitchesLEDS.3 | length 29.8
  Bottom Layer w0.8: SwitchesLEDS.3@135.382,118.364 134.542,118.364 134.542,117.66 133.546,116.664 133.148,116.664 132.048,115.564 131.598,115.564 131.297,115.263 131.297,114.233 130.47,113.406 130.47,111.37 131.365,110.475 132.408,110.475 132.818,110.885 137.22,110.885 138.32,109.785 143.864,109.785 144.964,108.685 145.883,108.685 146.879,107.689 146.879,107.121 147.015,106.985 Latch_leds.6@147.719,106.985
NetLatch_leds_9: Latch_leds.9 SwitchesLEDS.4 | length 52.6
  Top Layer w0.8: v1(125.349,112.268) 125.603,112.522 v1(131.953,112.522)
  Bottom Layer w0.8: v1(125.349,112.268) 125.349,116.459 129.413,120.523 135.763,120.523 SwitchesLEDS.4@137.922,118.364 ; v1(131.953,112.522) 131.953,112.395 132.363,111.985 137.676,111.985 138.776,110.885 144.39,110.885 144.775,110.5 144.775,110.429 145.42,109.785 146.339,109.785 147.439,108.685 148.423,108.685 148.523,108.585 149.455,108.585 149.555,108.685 150.963,108.685 151.063,108.585 151.995,108.585 152.095,108.685 153.503,108.685 153.603,108.585 154.686,108.585 154.686,107.638 Latch_leds.9@155.339,106.985
NetLatch_leds_12: Latch_leds.12 SwitchesLEDS.5 | length 19.8
  Bottom Layer w0.8: SwitchesLEDS.5@140.462,118.364 140.462,118.999 142.367,120.904 143.986,120.904 144.246,121.164 150.013,121.164 150.882,120.295 150.882,119.062 Latch_leds.12@155.339,114.605
NetLatch_leds_15: Latch_leds.15 SwitchesLEDS.6 | length 13.7
  Bottom Layer w0.8: SwitchesLEDS.6@143.002,118.364 144.702,120.064 149.557,120.064 149.782,119.839 149.782,117.66 147.719,115.597 Latch_leds.15@147.719,114.605
NetLatch_leds_16: Latch_leds.16 SwitchesLEDS.7 | length 4.2
  Bottom Layer w0.8: Latch_leds.16@145.179,114.605 145.179,115.454 144.78,115.853 144.78,116.753 145.179,117.152 145.179,118.001 SwitchesLEDS.7@145.542,118.364
NetLatch_leds_19: Latch_leds.19 SwitchesLEDS.8 | length 13
  Top Layer w0.8: v1(139.065,116.459) 146.304,116.459 v1(146.431,116.332)
  Bottom Layer w0.8: Latch_leds.19@137.559,114.605 137.559,115.588 138.43,116.459 v1(139.065,116.459) ; v1(146.431,116.332) 146.431,116.713 SwitchesLEDS.8@148.082,118.364
NetOe_Schmitt_trigger_5: Oe_Schmitt_trigger.5 Oe_Schmitt_trigger.12 | length 9.7
  Bottom Layer w0.8: Oe_Schmitt_trigger.12@146.05,58.801 146.05,57.404 151.13,52.324 Oe_Schmitt_trigger.5@151.13,51.181
NetOe_Schmitt_trigger_8: Oe_Schmitt_trigger.8 Oe_Schmitt_trigger.11 | length 11.1
  Bottom Layer w0.8: Oe_Schmitt_trigger.11@148.59,58.801 148.59,57.658 150.241,56.007 154.178,56.007 156.21,58.039 Oe_Schmitt_trigger.8@156.21,58.801
NetOe_Schmitt_trigger_13: Oe_Schmitt_trigger.13 Sar/Delta_Jumper.2 | length 85.3
  Top Layer w0.8: v1(80.137,62.738) 80.137,67.183 80.01,67.31 80.899,68.199 89.535,68.199 94.742,62.992 94.742,60.674 93.218,59.15 93.218,57.023 94.742,55.499 110.888,55.499 111.08,55.691 112.186,55.691 112.378,55.499 113.411,55.499 114.173,54.737 116.586,54.737 v1(116.713,54.61)
  Bottom Layer w0.8: v1(80.137,62.738) 80.137,62.865 80.01,62.992 80.899,63.881 Sar/Delta_Jumper.2@82.55,63.881 ; v1@117.221,54.61 118.323,55.712 135.785,55.712 136.207,56.134 142.367,56.134 143.51,57.277 Oe_Schmitt_trigger.13@143.51,58.801
NetPinsAdicionales_FPGA_2: PinsAdicionales_FPGA.2 R_FPGA_S&H.2 | length 4.1
  Bottom Layer w0.8: R_FPGA_S&H.2@215.646,99.314 215.773,99.441 PinsAdicionales_FPGA.2@219.71,99.441
NetR1-S&H_2: R1-S&H.2 RVar-S&H.1 | length 6.8
  Bottom Layer w0.8: RVar-S&H.1@193.802,76.708 196.469,74.041 R1-S&H.2@199.517,74.041
NetR1_2: R1.2 R2.1 UOFF.6 | length 42.6
  Bottom Layer w0.8: R1.2@111.76,133.604 113.157,133.604 113.792,132.969 113.792,130.302 ; R2.1@113.792,120.65 111.379,120.65 108.458,117.729 106.553,117.729 102.87,121.412 102.87,122.142 104.019,123.291 104.019,126.509 102.954,127.574 102.954,129.211 104.605,130.862 106.484,128.983 107.892,128.983 109.211,130.302 113.792,130.302 ; UOFF.6@115.951,129.794 114.3,129.794 113.792,130.302
NetR2_2: R2.2 UOFF.1 UOFF.2 | length 6.8
  Bottom Layer w0.8: UOFF.2@123.571,127.254 UOFF.1@123.571,124.714 123.571,121.031 R2.2@123.952,120.65
NetR3_2: R3.2 UOFF.3 | length 23.9
  Top Layer w0.8: v1(107.95,139.573) v1(111.379,139.573)
  Bottom Layer w0.8: R3.2@104.775,139.573 v1(107.95,139.573) ; v1(111.379,139.573) 113.454,137.498 115.264,137.498 117.051,135.711 117.051,133.901 121.158,129.794 UOFF.3@123.571,129.794
NetR3_3: R3.3 R4.2 | length 12.1
  Bottom Layer w0.8: R4.2@99.314,134.239 100.838,134.239 101.727,135.128 101.727,140.843 102.997,142.113 R3.3@104.775,142.113
NetR5_1: R5.1 R6.2 UOFF.5 | length 30.5
  Top Layer w0.8: R6.2@95.758,134.239 95.758,132.842 96.647,131.953 102.685,131.953 107.13,136.398 v1(110.871,136.398)
  Bottom Layer w0.8: R5.1@92.456,134.112 95.631,134.112 R6.2@95.758,134.239 ; v1(110.871,136.398) 114.808,136.398 115.951,135.255 UOFF.5@115.951,132.334
NetRVar-S&H_2: RVar-S&H.2 S&H.2 | length 21.9
  Bottom Layer w0.8: RVar-S&H.2@193.802,79.248 199.898,85.344 202.438,85.344 204.089,86.995 204.089,91.948 203.2,92.837 S&H.2@201.041,92.837
NetU1_3: U1.3 U1.4 | length 2.5
  Bottom Layer w0.8: U1.3@80.264,136.779 U1.4@80.264,139.319
NewStartADA: Latch_leds.11 PinsAdicionales_FPGA.4 R_NewStart.1 | length 65.7
  Top Layer w0.8: v1(190.246,111.887) v1(195.453,111.887) ; v1(208.026,106.299) v1(213.233,106.299)
  Bottom Layer w0.8: Latch_leds.11@157.879,114.605 158.082,114.808 160.274,114.808 R_NewStart.1@161.544,113.538 ; R_NewStart.1@161.671,112.649 161.671,112.6 188.136,112.6 188.849,111.887 v1(190.246,111.887) ; v1(195.453,111.887) 201.041,106.299 v1(208.026,106.299) ; v1(213.233,106.299) 213.741,106.299 215.519,104.521 PinsAdicionales_FPGA.4@219.71,104.521
NoInvOpAmp: ADA_Opamp.3 DAC_ADA.2 DAC_ADA_R4.2 | length 13.3
  Bottom Layer w0.8: DAC_ADA.2@221.234,122.682 222.123,123.571 DAC_ADA_R4.2@225.679,123.571 225.679,126.374 226.236,126.931 226.236,127.049 226.314,127.127 226.314,129.032 227.076,129.794 ADA_Opamp.3@228.727,129.794
OE_chip_sel: ADC_integrado.9 Jumper_FPGA/Integrado.3 OE_PulldownADC_R2.2 | length 133.4
  Top Layer w0.8: OE_PulldownADC_R2.2@70.104,51.816 70.104,49.836 70.537,49.403 81.377,49.403 81.882,48.898 83.29,48.898 83.795,49.403 85.877,49.403 86.382,48.898 87.79,48.898 88.295,49.403 94.497,49.403 94.546,49.354 95.954,49.354 96.003,49.403 97.894,49.403 97.943,49.354 99.351,49.354 99.4,49.403 101.291,49.403 101.34,49.354 102.749,49.354 102.798,49.403 104.689,49.403 104.738,49.354 106.146,49.354 106.195,49.403 108.086,49.403 108.135,49.354 128.856,49.354 132.461,52.959 154.178,52.959 161.417,60.198 v1(162.052,60.198)
  Bottom Layer w0.8: OE_PulldownADC_R2.2@70.104,51.816 69.977,51.943 69.977,53.594 70.993,54.61 70.993,73.914 ADC_integrado.9@77.089,80.01 ; Jumper_FPGA/Integrado.3@162.179,57.531 v1@162.179,60.071
OE_fpga_sel: Jumper_FPGA/Integrado.1 OE_PulldownADC_R1.2 PinsAdicionales_FPGA.3 | length 159.9
  Top Layer w0.8: v1(170.434,52.451) 171.323,51.562 239.141,51.562 240.919,53.34 240.919,62.611 239.6,63.93 229.694,63.93 228.854,64.77 228.854,70.494 228.043,71.305 228.043,73.624 226.405,75.262 224.34,75.262 223.344,76.258 223.344,77.79 221.55,79.584 221.55,80.69 223.217,82.357 223.217,96.471 v1(223.266,96.52)
  Bottom Layer w0.8: Jumper_FPGA/Integrado.1@162.179,52.451 v1(170.434,52.451) ; OE_PulldownADC_R1.2@213.614,108.331 218.83,108.331 221.488,105.673 221.488,102.489 220.98,101.981 PinsAdicionales_FPGA.3@219.71,101.981 223.266,98.425 v1(223.266,96.52)
OE_negado: Latch_leds.1 LedDriver1.1 LedDriver1.19 Oe_Schmitt_trigger.2 Oe_Schmitt_trigger.3 | length 227.6
  Top Layer w0.8: v1(127.762,115.697) 127.762,119.253 ; v1(129.032,53.34) 129.032,58.039 136.779,65.786 147.049,65.786 148.909,67.646 148.909,67.756 149.098,67.945 149.098,69.342 135.128,83.312 v1(135.128,95.123) ; v1@152.273,123.317 131.826,123.317 127.762,119.253 ; v1(171.849,142.476) 171.105,141.732 164.211,141.732 162.052,143.891 133.985,143.891 131.926,141.832 131.902,141.832 130.906,140.836 130.906,140.812 127.762,137.668 127.762,119.253
  Bottom Layer w0.8: v1@127.635,115.316 127.127,114.808 127.127,109.982 130.124,106.985 Latch_leds.1@135.019,106.985 134.874,106.84 135.128,106.586 v1(135.128,95.123) ; v1(129.032,53.34) 129.921,54.229 141.097,54.229 143.51,51.816 Oe_Schmitt_trigger.2@143.51,51.181 Oe_Schmitt_trigger.3@146.05,51.181 ; v1(152.4,123.317) 152.527,123.19 155.575,123.19 160.401,128.016 166.116,128.016 169.309,131.209 LedDriver1.1@169.309,132.385 ; LedDriver1.19@171.849,140.005 v1(171.849,142.476)
StartADA: ADC_integrado.6 FPGA.17 Oe_Schmitt_trigger.10 | length 113.3
  Bottom Layer w0.8: ADC_integrado.6@77.089,72.39 75.438,72.39 74.168,71.12 74.168,52.197 77.216,49.149 81.631,49.149 81.882,48.898 83.29,48.898 83.541,49.149 86.131,49.149 86.382,48.898 87.79,48.898 88.041,49.149 110.617,49.149 114.3,52.832 114.3,57.785 ; FPGA.17@114.3,59.69 114.3,57.912 134.874,57.912 140.208,63.246 146.685,63.246 Oe_Schmitt_trigger.10@151.13,58.801
~E0_DAC_ADC: DAC_fpga.4 E0_ADC_R2.2 | length 5.2
  Bottom Layer w0.8: DAC_fpga.4@172.212,77.089 174.244,75.057 E0_ADC_R2.2@176.53,75.057
pads on no net: "U 15V.None" BUFFER_ADC2.5 Comparador.2 Comparador.4 Comparador.5 Comparador.8 Comparador.9 Comparador.10 Comparador.11 Comparador.13 Comparador.14 PulsadorStart.1 PulsadorStart.3 U5V.1 U5V.None U-5V.1 U-5V.None U-15V.None

## Keep-outs
Keep-Out Layer:
  the board outline again, w0.2

## Text inside footprints (layer, text, board x,y; h text height)
U5V: Mechanical 4 "3" at 50.923,73.66 h1.88 r90; Mechanical 4 "2" at 50.923,71.119 h1.88 r90; Mechanical 4 "1" at 50.923,68.574 h1.88 r90; Mechanical 4 "3" at 50.923,73.66 h1.88 r90; Mechanical 4 "2" at 50.923,71.119 h1.88 r90; Mechanical 4 "1" at 50.923,68.574 h1.88 r90
"U 15V": Mechanical 4 "3" at 50.923,97.409 h1.88 r90; Mechanical 4 "2" at 50.923,94.868 h1.88 r90; Mechanical 4 "1" at 50.923,92.323 h1.88 r90; Mechanical 4 "3" at 50.923,97.409 h1.88 r90; Mechanical 4 "2" at 50.923,94.868 h1.88 r90; Mechanical 4 "1" at 50.923,92.323 h1.88 r90
U-5V: Mechanical 4 "3" at 50.923,85.598 h1.88 r90; Mechanical 4 "2" at 50.923,83.057 h1.88 r90; Mechanical 4 "1" at 50.923,80.512 h1.88 r90; Mechanical 4 "3" at 50.923,85.598 h1.88 r90; Mechanical 4 "2" at 50.923,83.057 h1.88 r90; Mechanical 4 "1" at 50.923,80.512 h1.88 r90
U-15V: Mechanical 4 "3" at 50.923,108.712 h1.88 r90; Mechanical 4 "2" at 50.923,106.171 h1.88 r90; Mechanical 4 "1" at 50.923,103.626 h1.88 r90; Mechanical 4 "3" at 50.923,108.712 h1.88 r90; Mechanical 4 "2" at 50.923,106.171 h1.88 r90; Mechanical 4 "1" at 50.923,103.626 h1.88 r90